# Altium PCB backplane.PCBDOC (part 3 of 4)
Units mil, origin at the board's own origin, x right, y up, seen from the top; angles counter-clockwise.
Board outline 14000 x 4750 mil, 6 copper layers (Top Layer, Internal Plane 1, Mid-Layer 1, Mid-Layer 2, Internal Plane 2, Bottom Layer), stack 54.4 mil thick; 197 components, 240 nets, 1698 pads, 1024 vias.
Unrouted connection lines stored in the file: 2.
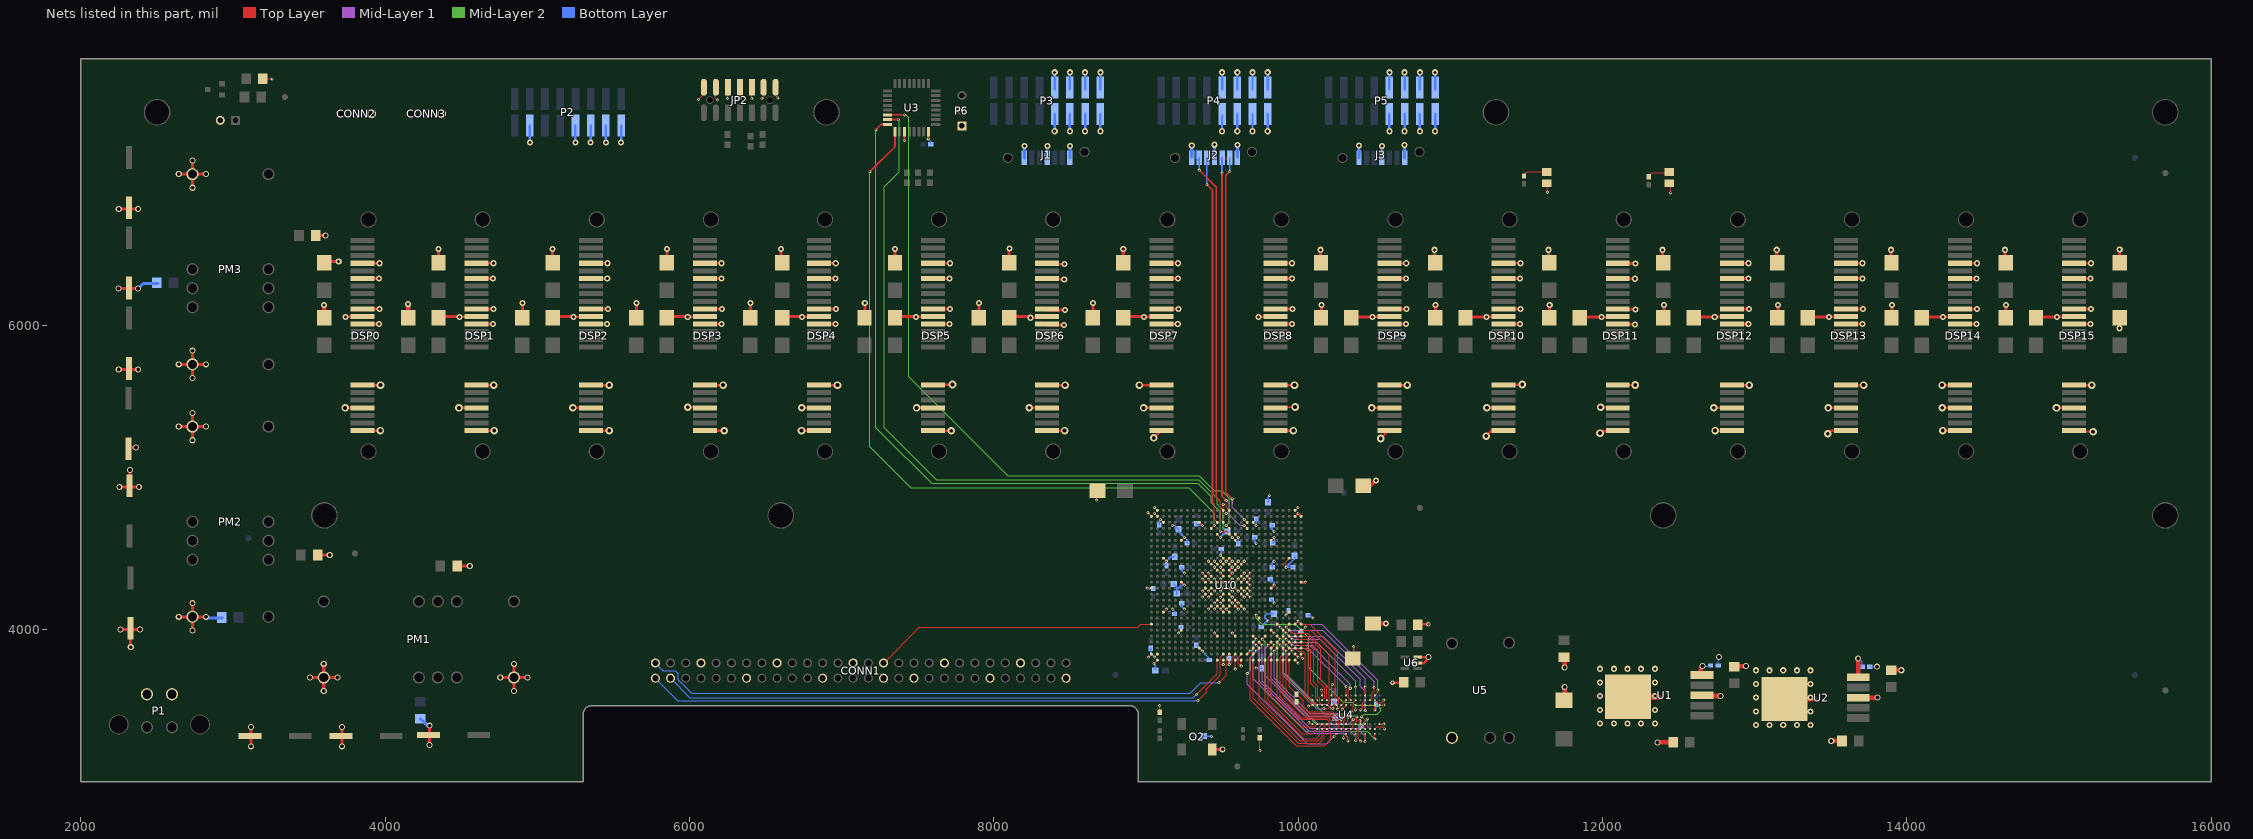
[diagram p7: the nets of this part, all layers, seen from the top]

## Via types
v1: diameter 40, hole 20, Top Layer to Bottom Layer, 338 vias
v2: diameter 20, hole 10, Top Layer to Bottom Layer, tented top, 325 vias
v3: diameter 20, hole 10, Top Layer to Bottom Layer, 197 vias
v4: diameter 40, hole 25, Top Layer to Bottom Layer, 113 vias
v5: diameter 50, hole 25, Top Layer to Bottom Layer, 48 vias
v6: diameter 30, hole 15, Top Layer to Bottom Layer, 3 vias

## Nets (pads, with @x,y where several pads share a name; then routed paths per layer and width w, separated by ;. In a path a pad name is that pad's centre, name@x,y a point inside that pad or via, vN(x,y) a via of type N, cw(c..) or ccw(c..) an arc to the next point about the centre after c; other vN are vias at no path point) (continued)
GND: C1.2 C2.2 C3.1 C4.1 C5.2 C6.2 C7.2 C8.2 C9.2 C10.2 C11.2 C12.2 C13.2 C14.2 C15.2 C16.1 C17.1 C18.2 C19.2 C20.2 C21.2 C22.2 C23.2 C24.2 C25.2 C27.2 C28.2 C29.2 C30.2 C31.2 C32.2 C34.2 C35.2 C37.2 C38.2 C39.2 C40.2 C41.2 C43.2 C44.2 C45.2 C46.1 C47.2 C48.2 C49.2 C50.2 C51.2 C52.2 C53.2 C54.2 C55.2 C56.2 C57.2 C58.2 C59.2 C60.2 C61.2 C62.2 C65.2 C67.2 C68.2 C69.2 C72.2 C73.2 C75.2 C76.2 C77.2 C78.2 C79.2 C80.2 C81.2 C82.2 C83.2 C84.2 C85.2 C86.2 C87.2 C88.2 C89.2 C90.2 C91.2 C92.2 C93.2 C104.2 C105.2 C106.2 C107.2 C108.2 C109.2 C110.2 C114.2 C115.2 C116.2 C117.2 C118.2 C119.2 C120.2 C121.1 C122.1 C123.2 C124.2 C125.1 C126.2 C127.2 C128.2 C129.2 C130.2 C131.2 C132.2 C136.2 C137.2 C138.2 C139.2 CONN1.2 CONN1.7 CONN1.12 CONN1.17 CONN1.22 CONN1.26 CONN1.29 CONN1.34 CONN1.39 CONN1.44 CONN1.49 CONN2.3 CONN3.3 DS1.2 DS2.2 DSP0.1 DSP0.4 DSP0.7 DSP0.P4 DSP0.P5 DSP0.P6 DSP0.P10 DSP0.P12 DSP1.1 DSP1.4 DSP1.7 DSP1.P4 DSP1.P5 DSP1.P6 DSP1.P10 DSP1.P12 DSP2.1 DSP2.4 DSP2.7 DSP2.P4 DSP2.P5 DSP2.P6 DSP2.P10 DSP2.P12 DSP3.1 DSP3.4 DSP3.7 DSP3.P4 DSP3.P5 DSP3.P6 DSP3.P10 DSP3.P12 DSP4.1 DSP4.4 DSP4.7 DSP4.P4 DSP4.P5 DSP4.P6 DSP4.P10 DSP4.P12 DSP5.1 DSP5.4 DSP5.7 DSP5.P4 DSP5.P5 DSP5.P6 DSP5.P10 DSP5.P12 DSP6.1 DSP6.4 DSP6.7 DSP6.P4 DSP6.P5 DSP6.P6 DSP6.P10 DSP6.P12 DSP7.1 DSP7.4 DSP7.7 DSP7.P4 DSP7.P5 DSP7.P6 DSP7.P10 DSP7.P12 DSP8.1 DSP8.4 DSP8.7 DSP8.P4 DSP8.P5 DSP8.P6 DSP8.P10 DSP8.P12 DSP9.1 DSP9.4 DSP9.7 DSP9.P4 DSP9.P5 DSP9.P6 DSP9.P10 DSP9.P12 DSP10.1 DSP10.4 DSP10.7 DSP10.P4 DSP10.P5 DSP10.P6 DSP10.P10 DSP10.P12 DSP11.1 DSP11.4 DSP11.7 DSP11.P4 DSP11.P5 DSP11.P6 DSP11.P10 DSP11.P12 DSP12.1 DSP12.4 DSP12.7 DSP12.P4 DSP12.P5 DSP12.P6 DSP12.P10 DSP12.P12 DSP13.1 DSP13.4 DSP13.7 DSP13.P4 DSP13.P5 DSP13.P6 DSP13.P10 DSP13.P12 DSP14.1 DSP14.4 DSP14.7 DSP14.P4 DSP14.P5 DSP14.P6 DSP14.P10 DSP14.P12 DSP15.1 DSP15.4 DSP15.7 DSP15.P4 DSP15.P5 DSP15.P6 DSP15.P10 DSP15.P12 J1.1 J1.4 J1.7 J2.1 J2.4 J2.7 J3.1 J3.4 J3.7 JP1.2 JP2.1 JP2.3 JP2.5 JP2.7 JP2.9 JP2.11 JP2.13 O2.2 P1.1 P1.2 P2.4 P2.10 P2.12 P2.14 P2.16 P3.9 P3.10 P3.11 P3.12 P3.13 P3.14 P3.15 P3.16 P4.9 P4.10 P4.11 P4.12 P4.13 P4.14 P4.15 P4.16 P5.9 P5.10 P5.11 P5.12 P5.13 P5.14 P5.15 P5.16 P6.1 PM1.1 PM1.7 PM2.1 PM2.7 PM3.1 PM3.7 R1.1 R2.1 R7.2 R14.1 R16.1 R18.2 R19.2 R21.1 U1.3 U2.3 U3.3 U3.8 U4.A3 U4.A7 U4.B2 U4.B3 U4.B8 U4.D2 U4.D8 U4.E7 U4.E8 U4.F2 U4.F3 U4.F8 U4.H2 U4.H8 U4.J3 U4.J7 U4.L1 U4.N1 U4.R3 U4.R7 U5.1 U6.2 U6.3 U10.A2 U10.A13 U10.A14 U10.A25 U10.AA6 U10.AA21 U10.AB12 U10.AB15 U10.AD9 U10.AD18 U10.AD24 U10.AE1 U10.AE2 U10.AE15 U10.AE16 U10.AE17 U10.AE25 U10.AE26 U10.AF2 U10.AF13 U10.AF14 U10.AF15 U10.AF16 U10.AF25 U10.B1 U10.B2 U10.B25 U10.B26 U10.C3 U10.C9 U10.C18 U10.E12 U10.E15 U10.F6 U10.F21 U10.J3 U10.J13 U10.J14 U10.J24 U10.K11 U10.K12 U10.K13 U10.K14 U10.K15 U10.K16 U10.L12 U10.L13 U10.L14 U10.L15 U10.M10 U10.M11 U10.M13 U10.M14 U10.M16 U10.M17 U10.N6 U10.N10 U10.N11 U10.N12 U10.N13 U10.N14 U10.N15 U10.N16 U10.N17 U10.N26 U10.P1 U10.P10 U10.P11 U10.P12 U10.P13 U10.P14 U10.P15 U10.P16 U10.P17 U10.P21 U10.R10 U10.R11 U10.R13 U10.R14 U10.R16 U10.R17 U10.T12 U10.T13 U10.T14 U10.T15 U10.U11 U10.U12 U10.U13 U10.U14 U10.U15 U10.U16 U10.V3 U10.V13 U10.V14 U10.V24 | length 36334.8
  Top Layer w6: R7.2@3195.12,7620 v3(3255.98,7620) ; v3(8673.23,4850.39) C38.2@8673.23,4913.39 ; v2(9007.87,4271.65) U10.P1@9035.43,4271.65 ; v2(9011.81,4767.72) U10.B1@9035.43,4744.09 ; v2(9015.75,3818.9) U10.AE1@9035.43,3838.58 ; v2(9051.18,3775.59) U10.AF2@9074.8,3799.21 ; v2(9055.12,3818.9) U10.AE2@9074.8,3838.58 ; v2(9055.12,4763.78) U10.B2@9074.8,4744.09 ; v2(9055.12,4803.15) U10.A2@9074.8,4783.46 ; R21.1@9090,3455.59 v3(9090,3499.45) ; v2(9094.49,4724.41) U10.C3@9114.17,4704.72 ; U10.V3@9114.17,4114.17 v2(9133.86,4133.86) ; v2(9212.6,3976.38) U10.AA6@9232.28,3996.06 ; U10.F6@9232.28,4586.61 v2(9251.97,4606.3) ; U10.AD9@9350.39,3877.95 v2(9370.08,3858.27) ; v2(9448.82,3976.38) U10.AB12@9468.5,3956.69 ; U10.E12@9468.5,4625.98 v2(9488.19,4606.3) ; v2(9507.87,3769.68) U10.AF13@9507.87,3799.21 ; U10.A13@9507.87,4783.46 9507.87,4803.15 v2(9507.87,4822.83) ; v2(9527.56,4133.86) U10.V14@9547.24,4114.17 ; v2(9527.56,4763.78) U10.A14@9547.24,4783.46 9527.56,4803.15 9527.56,4826.93 ; v2(9547.24,3769.69) U10.AF14@9547.24,3799.21 ; v2(9566.93,3976.38) U10.AB15@9586.61,3956.69 ; U10.U15@9586.61,4153.54 v2(9606.3,4133.86) ; U10.T15@9586.61,4192.91 v2(9606.3,4173.23) ; U10.E15@9586.61,4625.98 v2(9606.3,4606.3) ; U10.AF16@9625.98,3799.21 v3(9625.98,3759.84) 9606.3,3779.53 9606.3,3818.9 U10.AE16@9625.98,3838.58 ; U10.U16@9625.98,4153.54 v2(9645.67,4133.86) ; U10.AE17@9665.35,3838.58 U10.AD18@9704.72,3877.95 ; U10.R17@9665.35,4232.28 v2(9685.04,4212.6) ; U10.P17@9665.35,4271.65 v2(9685.04,4251.97) ; U10.N17@9665.35,4311.02 v2(9685.04,4291.34) ; U10.M17@9665.35,4350.39 v2(9685.04,4330.71) ; U10.C18@9704.72,4704.72 v2(9724.41,4685.04) ; v3(9748.01,3204.74) R16.1@9748.01,3289.36 ; U10.AA21@9822.83,3996.06 v2(9842.52,3976.38) ; U10.F21@9822.83,4586.61 v2(9842.52,4606.3) ; v2(9921.26,4094.49) U10.V24@9940.95,4114.17 ; v2(9921.26,4409.45) 9921.26,4448.82 U10.J24@9940.95,4468.5 ; U10.AD24@9940.95,3877.95 v2(9960.63,3858.27) ; U10.AF25@9980.32,3799.21 v2(10000,3779.53) v2@10003.94,3775.59 ; U10.AE25@9980.32,3838.58 v2(10000,3818.9) ; U10.B25@9980.32,4744.09 v2(10000,4763.78) ; U10.A25@9980.32,4783.46 v2(10000,4803.15) ; v2@10019.69,3811.02 U10.AE26@10019.69,3838.58 ; v3@10066.94,3503.93 U4.R3@10094.47,3503.93 ; v3@10072.83,3390.75 10085.64,3377.95 U4.R7@10094.47,3377.95 ; U4.N1@10157.46,3566.92 v3@10157.46,3598.4 ; v3@10220,3640 10220.45,3639.55 U4.L1@10220.45,3566.92 ; v3(10259.84,3476.38) 10283.46,3500 10283.46,3503.94 U4.H2@10314.94,3535.43 ; U4.J7@10283.44,3377.95 v3(10283.44,3409.43) ; v3(10299.21,3287.4) 10299.21,3330.72 U4.H8@10314.94,3346.45 ; v3(10354.33,3456.69) 10354.33,3476.38 10362.2,3484.25 10362.2,3519.7 U4.F2@10377.93,3535.43 ; U4.F8@10374.02,3346.46 10393.7,3326.77 10393.7,3282.27 v3(10409.45,3266.53) ; v3(10377.93,3472.46) U4.F3@10377.93,3503.93 ; v3@10405.51,3397.64 10409.43,3393.72 U4.E8@10409.43,3346.45 ; U4.E7@10409.43,3377.95 U4.D8@10440.92,3346.45 ; v3(10409.45,3472.44) 10425.2,3488.19 10425.2,3519.7 U4.D2@10440.92,3535.43 ; U4.B8@10503.92,3346.45 10519.67,3362.2 10551.18,3362.2 v3(10566.93,3346.46) ; v3(10503.92,3472.46) U4.B3@10503.92,3503.93 ; U4.B2@10503.92,3535.43 10519.66,3519.68 10547.24,3519.68 v3(10562.99,3535.43) ; U4.A7@10535.41,3377.95 v3(10562.99,3377.95) ; U4.A3@10535.41,3503.93 v3(10562.99,3503.93) ; v3(11637.77,6874) DS1.2@11637.77,6929.12 ; v3(12448.79,6870.06) DS2.2@12448.79,6936.99
  Top Layer w8: v3(6060,7485) 6093.78,7518.78 JP2.13@6093.78,7563.66 ; JP2.11@6170,7565 6170,7495 v3(6185,7480) ; v3(6250,7490) JP2.9@6250,7560 ; v3(6330,7490) JP2.7@6330,7560 ; v3(6410,7490) JP2.5@6410,7560 ; v3(6475,7490) 6490,7505 JP2.3@6490,7565 ; JP2.1@6565,7560 6565,7510 v3(6580,7495) ; U10.J3@9114.17,4468.5 v2(9133.86,4448.82) ; v2(9370.08,4212.6) U10.R10@9389.76,4232.28 ; v2(9370.08,4251.97) U10.P10@9389.76,4271.65 ; v2(9370.08,4330.71) U10.N10@9389.76,4311.02 ; v2(9370.08,4370.08) U10.M10@9389.76,4350.39 ; v2(9409.45,4133.86) U10.U11@9429.13,4153.54 ; v2(9409.45,4212.6) U10.R11@9429.13,4232.28 ; v2(9409.45,4251.97) U10.P11@9429.13,4271.65 ; v2(9409.45,4330.71) U10.N11@9429.13,4311.02 ; v2(9409.45,4370.08) U10.M11@9429.13,4350.39 ; v2(9409.45,4448.82) U10.K11@9429.13,4429.13 ; v2(9448.82,4133.86) U10.U12@9468.5,4153.54 ; v2(9448.82,4173.23) U10.T12@9468.5,4192.91 ; v2(9448.82,4251.97) U10.P12@9468.5,4271.65 ; v2(9448.82,4330.71) U10.N12@9468.5,4311.02 ; v2(9448.82,4409.45) U10.L12@9468.5,4389.76 ; v2(9448.82,4448.82) U10.K12@9468.5,4429.13 ; v2(9488.19,4173.23) U10.T13@9507.87,4192.91 ; v2(9488.19,4212.6) U10.R13@9507.87,4232.28 ; v2(9488.19,4251.97) U10.P13@9507.87,4271.65 ; v2(9488.19,4330.71) U10.N13@9507.87,4311.02 ; v2(9488.19,4370.08) U10.M13@9507.87,4350.39 ; v2(9488.19,4409.45) U10.L13@9507.87,4389.76 ; v2(9488.19,4448.82) U10.K13@9507.87,4429.13 ; v2(9488.19,4488.19) U10.J13@9507.87,4468.5 ; U10.V13@9507.87,4114.17 v2(9488.19,4133.86) U10.U13@9507.87,4153.54 ; v2(9527.56,4133.86) U10.U14@9547.24,4153.54 ; v2(9547.24,3769.69) 9566.93,3789.37 9566.93,3818.9 U10.AE15@9586.61,3838.58 ; U10.T14@9547.24,4192.91 v2(9566.93,4173.23) ; U10.R14@9547.24,4232.28 v2(9566.93,4212.6) ; U10.P14@9547.24,4271.65 v2(9566.93,4251.97) ; U10.N14@9547.24,4311.02 v2(9566.93,4330.71) ; U10.M14@9547.24,4350.39 v2(9566.93,4370.08) ; U10.L14@9547.24,4389.76 v2(9566.93,4409.45) ; U10.K14@9547.24,4429.13 v2(9566.93,4448.82) ; v3(9586.61,3740.16) U10.AF15@9586.61,3799.21 ; U10.P15@9586.61,4271.65 v2(9606.3,4251.97) ; U10.N15@9586.61,4311.02 v2(9606.3,4330.71) ; U10.L15@9586.61,4389.76 v2(9606.3,4409.45) ; U10.K15@9586.61,4429.13 v2(9606.3,4448.82) ; U10.R16@9625.98,4232.28 v2(9645.67,4212.6) ; U10.P16@9625.98,4271.65 v2(9645.67,4251.97) ; U10.N16@9625.98,4311.02 v2(9645.67,4330.71) ; U10.M16@9625.98,4350.39 v2(9645.67,4370.08) ; U10.K16@9625.98,4429.13 v2(9645.67,4448.82) ; U10.M17@9665.35,4350.39 v2(9685.04,4370.08)
  Top Layer w10: C27.2@8102.35,6417.31 C27.2@8102.35,6418.43 ; C1.2@10364.17,3809.06 v3(10364.17,3887.8)
  Top Layer w11: v3(7411.42,7214.57) U3.3@7411.42,7273.62 ; v3(7568.9,7224.41) U3.8@7568.9,7273.62 ; U10.C9@9350.39,4704.72 v2(9370.08,4685.04) ; v2(9527.56,4448.82) U10.J14@9547.24,4468.5 ; v2(10000,4763.78) U10.B26@10019.69,4744.09
  Top Layer w16: v5(3736.22,5456.69) DSP0.4@3854.33,5456.69 ; DSP0.7@3850.39,5606.3 v5(3968.5,5606.3) ; DSP0.1@3850.63,5307.4 v5(3968.19,5307.4) ; v5(4484.25,5456.69) DSP1.4@4598.43,5456.69 ; DSP1.1@4600.63,5307.4 v5(4716.85,5307.4) ; DSP1.7@4602.36,5606.3 v5(4712.6,5606.3) ; v5(5232.99,5457.4) DSP2.4@5350.63,5457.4 ; DSP2.7@5350.39,5606.3 v5(5472.44,5606.3) ; DSP2.1@5350.63,5307.4 v5(5472.13,5307.4) ; v5(5988.19,5460.63) DSP3.4@6098.43,5460.63 ; DSP3.1@6102.36,5307.09 v5(6228.35,5307.09) ; DSP3.7@6102.36,5606.3 v5(6220.47,5606.3) ; v5(6735.91,5307.4) DSP4.1@6850.63,5307.4 ; v5(6736.93,5457.4) DSP4.4@6850.63,5457.4 ; DSP4.7@6854.33,5606.3 v5(6972.44,5606.3) ; v5(7492.13,5456.69) DSP5.4@7602.36,5456.69 ; DSP5.1@7598.43,5307.09 v5(7720.47,5307.09) ; DSP5.7@7598.43,5610.24 v5(7728.35,5610.24) ; v5(8232.99,5457.4) DSP6.4@8350.63,5457.4 ; DSP6.7@8350.39,5606.3 v5(8468.5,5606.3) ; DSP6.1@8350.63,5307.4 v5(8464.88,5307.4) ; v5(8956.69,5606.3) DSP7.7@9102.36,5606.3 ; v5(8984.25,5456.69) DSP7.4@9102.36,5456.69 ; v5(9051.18,5259.84) DSP7.1@9098.43,5307.09 ; U10.N6@9232.28,4311.02 v2(9251.97,4291.34) ; U10.P21@9822.83,4271.65 v2(9842.52,4291.34) ; DSP8.7@9850.39,5606.3 v5(9976.38,5606.3) ; DSP8.1@9850.63,5307.4 v5(9968.82,5307.4) ; DSP8.4@9850.63,5457.4 v5(9980.32,5462.6) ; U10.N26@10019.69,4311.02 v2@10039.37,4311.02 ; v5(10484.25,5456.69) DSP9.4@10602.36,5456.69 ; v5(10543.31,5255.91) 10594.8,5307.4 DSP9.1@10600.63,5307.4 ; DSP9.7@10594.49,5606.3 v5(10716.54,5606.3) ; v6(10620.08,3651.57) C3.1@10688.98,3651.57 ; U6.3@10785.41,3818.89 v4(10856.29,3818.89) ; U6.2@10787.4,3779.53 10826.77,3779.53 v4@10856.3,3809.06 ; R18.2@10787.4,4035.43 v6(10856.3,4035.43) ; v5(11236.22,5271.65) 11271.97,5307.4 DSP10.1@11350.63,5307.4 ; v5(11240.87,5457.4) DSP10.4@11350.63,5457.4 ; DSP10.7@11346.46,5610.24 v5(11472.44,5610.24) ; v5(11984.25,5291.34) 11996.06,5303.15 DSP11.1@12098.43,5303.15 ; v5(11988.19,5460.63) DSP11.4@12102.36,5460.63 ; DSP11.7@12100.63,5607.4 v5(12215.43,5607.4) ; v5(12731.57,5457.4) DSP12.4@12850.63,5457.4 ; v5(12740.47,5307.4) DSP12.1@12850.63,5307.4 ; DSP12.7@12850.39,5606.3 v5(12964.57,5606.3) ; v5(13480.32,5287.4) 13500,5307.09 DSP13.1@13602.36,5307.09 ; v5(13484.25,5456.69) DSP13.4@13602.36,5456.69 ; DSP13.7@13602.36,5606.3 v5(13716.54,5606.3) ; v5(14232.28,5606.3) DSP14.7@14350.39,5606.3 ; v5(14232.99,5457.4) DSP14.4@14350.63,5457.4 ; v5(14236.54,5307.4) DSP14.1@14350.63,5307.4 ; v5(14984.25,5456.69) DSP15.4@15102.36,5456.69 ; DSP15.7@15098.43,5606.3 v5(15216.54,5606.3) ; DSP15.1@15102.36,5307.09 v5(15225,5300)
  Top Layer w18: v1(3738.17,6055.11) DSP0.P5@3852.34,6055.11 ; DSP0.P4@3848.4,6007.86 v1(3958.64,6007.86) ; DSP0.P6@3848.4,6106.29 v1(3962.58,6106.29) ; DSP0.P10@3850.63,6307.4 v1(3958.97,6307.4) ; DSP0.P12@3850.63,6407.4 v1(3960.67,6407.4) ; v1(4488.17,6055.11) DSP1.P5@4602.34,6055.11 ; DSP1.P4@4598.4,6007.86 v1(4708.64,6007.86) ; DSP1.P6@4598.4,6106.29 v1(4712.58,6106.29) ; DSP1.P10@4600.63,6307.4 v1(4708.97,6307.4) ; DSP1.P12@4600.63,6407.4 v1(4710.67,6407.4) ; v1(5238.17,6055.11) DSP2.P5@5352.34,6055.11 ; DSP2.P4@5348.4,6007.86 v1(5458.64,6007.86) ; DSP2.P6@5348.4,6106.29 v1(5462.58,6106.29) ; DSP2.P10@5350.63,6307.4 v1(5458.97,6307.4) ; DSP2.P12@5350.63,6407.4 v1(5460.67,6407.4) ; v1(5988.17,6055.11) DSP3.P5@6102.34,6055.11 ; DSP3.P4@6098.4,6007.86 v1(6208.64,6007.86) ; DSP3.P6@6098.4,6106.29 v1(6212.58,6106.29) ; DSP3.P10@6100.63,6307.4 v1(6208.97,6307.4) ; DSP3.P12@6100.63,6407.4 v1(6210.67,6407.4) ; v1(6738.17,6055.11) DSP4.P5@6852.34,6055.11 ; DSP4.P4@6848.4,6007.86 v1(6958.64,6007.86) ; DSP4.P6@6848.4,6106.29 v1(6962.58,6106.29) ; DSP4.P10@6850.63,6307.4 v1(6958.97,6307.4) ; DSP4.P12@6850.63,6407.4 v1(6960.67,6407.4) ; v1(7488.17,6055.11) DSP5.P5@7602.34,6055.11 ; DSP5.P4@7598.4,6007.86 v1(7708.64,6007.86) ; DSP5.P6@7598.4,6106.29 v1(7712.58,6106.29) ; DSP5.P10@7600.63,6307.4 v1(7708.97,6307.4) ; DSP5.P12@7600.63,6407.4 v1(7710.67,6407.4) ; v1(8241.85,6049.27) DSP6.P5@8356.02,6049.27 ; DSP6.P4@8352.09,6002.02 v1(8462.32,6002.02) ; DSP6.P6@8352.09,6100.45 v1(8466.26,6100.45) ; DSP6.P10@8354.31,6301.56 v1(8462.65,6301.56) ; DSP6.P12@8354.31,6401.56 v1(8464.36,6401.56) ; v1(8988.17,6055.11) DSP7.P5@9102.34,6055.11 ; DSP7.P4@9098.4,6007.86 v1(9208.64,6007.86) ; DSP7.P6@9098.4,6106.29 v1(9212.58,6106.29) ; DSP7.P10@9100.63,6307.4 v1(9208.97,6307.4) ; DSP7.P12@9100.63,6407.4 v1(9210.67,6407.4) ; v1(9738.17,6055.11) DSP8.P5@9852.34,6055.11 ; DSP8.P4@9848.4,6007.86 v1(9958.64,6007.86) ; DSP8.P6@9848.4,6106.29 v1(9962.58,6106.29) ; DSP8.P10@9850.63,6307.4 v1(9958.97,6307.4) ; DSP8.P12@9850.63,6407.4 v1(9960.67,6407.4) ; v1(10488.17,6055.11) DSP9.P5@10602.34,6055.11 ; DSP9.P4@10598.4,6007.86 v1(10708.64,6007.86) ; DSP9.P6@10598.4,6106.29 v1(10712.58,6106.29) ; DSP9.P10@10600.63,6307.4 v1(10708.97,6307.4) ; DSP9.P12@10600.63,6407.4 v1(10710.67,6407.4) ; v1(11238.17,6055.11) DSP10.P5@11352.34,6055.11 ; DSP10.P4@11348.4,6007.86 v1(11458.64,6007.86) ; DSP10.P6@11348.4,6106.29 v1(11462.58,6106.29) ; DSP10.P10@11350.63,6307.4 v1(11458.97,6307.4) ; DSP10.P12@11350.63,6407.4 v1(11460.67,6407.4) ; v1(11993.81,6053.2) DSP11.P5@12107.99,6053.2 ; DSP11.P4@12104.05,6005.96 v1(12214.28,6005.96) ; DSP11.P6@12104.05,6104.38 v1(12218.22,6104.38) ; DSP11.P10@12106.27,6305.5 v1(12214.61,6305.5) ; DSP11.P12@12106.27,6405.5 v1(12216.32,6405.5) ; v1(12738.17,6055.11) DSP12.P5@12852.34,6055.11 ; DSP12.P4@12848.4,6007.86 v1(12958.64,6007.86) ; DSP12.P6@12848.4,6106.29 v1(12962.58,6106.29) ; DSP12.P10@12850.63,6307.4 v1(12958.97,6307.4) ; DSP12.P12@12850.63,6407.4 v1(12960.67,6407.4) ; v1(13488.17,6055.11) DSP13.P5@13602.34,6055.11 ; DSP13.P4@13598.4,6007.86 v1(13708.64,6007.86) ; DSP13.P6@13598.4,6106.29 v1(13712.58,6106.29) ; DSP13.P10@13600.63,6307.4 v1(13708.97,6307.4) ; DSP13.P12@13600.63,6407.4 v1(13710.67,6407.4) ; v1(14238.17,6055.11) DSP14.P5@14352.34,6055.11 ; DSP14.P4@14348.4,6007.86 v1(14458.64,6007.86) ; DSP14.P6@14348.4,6106.29 v1(14462.58,6106.29) ; DSP14.P10@14350.63,6307.4 v1(14458.97,6307.4) ; DSP14.P12@14350.63,6407.4 v1(14460.67,6407.4) ; v1(14988.17,6055.11) DSP15.P5@15102.34,6055.11 ; DSP15.P4@15098.4,6007.86 v1(15208.64,6007.86) ; DSP15.P6@15098.4,6106.29 v1(15212.58,6106.29) ; DSP15.P10@15100.63,6307.4 v1(15208.97,6307.4) ; DSP15.P12@15100.63,6407.4 v1(15210.67,6407.4)
  Top Layer w20: v4(2246.07,6242.15) v4(2374.02,6242.15) ; v4(2248.04,5708.67) v4(2375.99,5708.67) ; v4(2248.04,6763.79) v4(2375.99,6763.79) ; v4(2251.97,4937.01) v4(2379.92,4937.01) ; v4(2259.84,4000) v4(2387.8,4000) ; C117.2@2312.99,5196.85 v4(2362.2,5196.85) ; C127.2@2322.83,4940.94 v4(2322.83,5049.21) ; v4(2326.76,3883.87) C126.2@2326.76,4007.85 ; v4(2642.7,4083.65) PM2.1@2732.28,4083.65 ; v4(2642.7,5333.65) PM2.7@2732.28,5333.65 ; v4(2642.7,5743.1) PM3.1@2732.28,5743.1 ; v4(2642.7,6993.1) PM3.7@2732.28,6993.1 ; v4(2732.28,3994.08) PM2.1@2732.28,4083.65 ; v4(2732.28,4173.23) PM2.1@2732.28,4083.65 ; v4(2732.28,5244.08) PM2.7@2732.28,5333.65 ; v4(2732.28,5423.23) PM2.7@2732.28,5333.65 ; v4(2732.28,5653.52) PM3.1@2732.28,5743.1 ; v4(2732.28,5832.67) PM3.1@2732.28,5743.1 ; v4(2732.28,6903.52) PM3.7@2732.28,6993.1 ; v4(2732.28,7082.67) PM3.7@2732.28,6993.1 ; v4(2821.85,4083.65) PM2.1@2732.28,4083.65 ; v4(2821.85,5333.65) PM2.7@2732.28,5333.65 ; v4(2821.85,5743.1) PM3.1@2732.28,5743.1 ; v4(2821.85,6993.1) PM3.7@2732.28,6993.1 ; v4(3118.08,3232.29) v4(3118.08,3360.24) ; v4(3505.89,3685.03) PM1.7@3595.46,3685.03 ; R14.1@3543.3,6590.54 v4(3608.25,6590.54) ; R1.1@3555,4490 v4@3621.93,4490 ; v4(3595.46,3595.46) PM1.7@3595.46,3685.03 ; v4(3595.46,3774.61) PM1.7@3595.46,3685.03 ; C6.2@3600,6418.43 v1(3694.02,6418.43) ; v4(3685.04,3685.03) PM1.7@3595.46,3685.03 ; v4(3716.51,3232.29) v4(3716.51,3360.24) ; v4(4291.31,3240.16) v4(4291.31,3368.11) ; C8.2@4350,6058.43 v1@4491.5,6058.43 ; C9.2@4350.39,6413.37 v1(4350.39,6499.99) ; R2.1@4472.43,4417.31 v4(4555.11,4417.31) ; v4(4755.89,3685.03) PM1.1@4845.46,3685.03 ; v4(4845.46,3595.46) PM1.1@4845.46,3685.03 ; v4(4845.46,3774.61) PM1.1@4845.46,3685.03 ; C10.2@4901.56,6055.11 v1(4901.56,6145.66) ; v4(4935.04,3685.03) PM1.1@4845.46,3685.03 ; C11.2@5100,6058.43 v1@5241.5,6058.43 ; C12.2@5100.39,6413.37 v1(5100.39,6499.99) ; C13.2@5651.56,6055.11 v1(5651.56,6145.66) ; C14.2@5850,6058.43 v1@5991.5,6058.43 ; C15.2@5850.39,6413.37 v1(5850.39,6499.99) ; C18.2@6401.56,6055.11 v1(6401.56,6145.66) ; C19.2@6600,6058.43 v1@6741.5,6058.43 ; C20.2@6600.39,6413.37 v1(6600.39,6499.99) ; C21.2@7151.56,6055.11 v1(7151.56,6145.66) ; C22.2@7350,6058.43 v1@7491.5,6058.43 ; C23.2@7350.39,6413.37 v1(7350.39,6499.99) ; C24.2@7901.56,6055.11 v1(7901.56,6145.66) ; C25.2@8100,6058.43 v1@8241.5,6058.43 ; C27.2@8100,6418.43 v1@8100,6506.27 ; C30.2@8651.57,6055.11 v1(8651.57,6145.66) ; C31.2@8850,6058.43 v1@8991.5,6058.43 ; C32.2@8850.39,6413.37 v1(8850.39,6499.99) ; O2.2@9436.2,3212.59 v4(9503.94,3212.59) ; C35.2@10145.65,6417.31 v1(10145.65,6496.05) ; C34.2@10153.52,6059.04 v1(10153.52,6133.85) ; C37.2@10346.44,6055.11 v1(10488.17,6055.11) ; C40.2@10895.65,6417.31 v1(10895.65,6496.05) ; C39.2@10903.52,6059.04 v1(10903.52,6133.85) ; C41.2@11096.44,6055.11 v1(11238.17,6055.11) ; C44.2@11645.65,6417.31 v1(11645.65,6496.05) ; C43.2@11653.52,6059.04 v1(11653.52,6133.85) ; C45.2@11846.44,6055.11 v1@11988.17,6055.11 ; C48.2@12395.65,6417.31 v1(12395.65,6496.05) ; C47.2@12403.52,6059.04 v1(12403.52,6133.85) ; C49.2@12596.44,6055.11 v1(12738.17,6055.11) ; C51.2@13145.65,6417.31 v1(13145.65,6496.05) ; C50.2@13153.52,6059.04 v1(13153.52,6133.85) ; C52.2@13346.44,6055.11 v1(13488.17,6055.11) ; C54.2@13895.65,6417.31 v1(13895.65,6496.05) ; C53.2@13903.52,6059.04 v1(13903.52,6133.85) ; C55.2@14096.44,6055.11 v1(14238.17,6055.11) ; C57.2@14645.65,6417.31 v1(14645.65,6496.05) ; C56.2@14653.52,6059.04 v1(14653.52,6133.85) ; C58.2@14846.44,6055.11 v1(14988.17,6055.11) ; v1(15397.61,5980.3) C59.2@15397.61,6055.11 ; C60.2@15400,6418.43 v1(15400,6498.44)
  Top Layer w24: C29.2@10433.07,4940.94 10472.44,4940.94 v1(10511.81,4980.31) ; C28.2@10500,4039.37 v1(10576.77,4039.37)
  Top Layer w30: C5.2@3598.43,6059.06 v1(3598.43,6133.86) ; C7.2@4150,6058.43 v1(4150,6138.19) ; C2.2@11751.97,3533.46 v4(11751.97,3622.05) ; v4(11751.97,3750) R19.2@11751.97,3818.9 ; U1.3@12165.35,3562.99 v1@12352.36,3562.99 ; U1.3@12173.2,3553.14 12372.04,3553.14 ; v4(12362.2,3257.87) C4.1@12460.63,3257.87 ; U1.3@12657.48,3562.99 v4(12775.59,3562.99) ; C16.1@12864.17,3759.84 v4(12942.91,3759.84) ; U2.3@13196.82,3543.3 13395.66,3543.3 ; v4(13503.94,3267.71) C17.1@13574.78,3267.71 ; U2.3@13681.82,3552.3 v4(13808.21,3552.3) ; C46.1@13897.61,3732.28 v4(13964.57,3732.28)
  Mid-Layer 1 w16: v5(7720.47,5307.09) v5@7728.35,5314.96
  Mid-Layer 1 w20: v4(3608.25,6590.54) v4@3612.2,6594.49
  Bottom Layer w6: v3(7568.9,7224.41) 7585.59,7207.72 C65.2@7585.59,7190 ; v2(9370.08,3858.27) 9415.59,3812.76 C80.2@9415.59,3800
  Bottom Layer w8: C92.2@9133.86,4419.29 v2(9133.86,4448.82) ; v2(9173.23,4133.86) 9191.01,4116.08 C89.2@9191.01,4094.49 ; C139.2@10236.22,3533.46 10259.84,3509.84 v3(10259.84,3476.38) ; v3@10407.48,3401.57 10415.33,3393.72 C138.2@10415.33,3362.2 ; v3(10503.92,3472.46) 10511.79,3480.34 C136.2@10511.79,3509.84 ; C61.2@12761.72,3763.77 v4(12765.75,3818.9) ; C62.2@13757.85,3755.9 v4(13805.11,3755.9)
  Bottom Layer w10: v2@9009.84,4269.69 C93.2@9047.24,4269.69 ; C83.2@9031.5,3876.05 9031.5,3842.52 v2(9055.12,3818.9) ; v2(9051.18,3775.59) 9061.02,3765.75 C109.2@9061.02,3732.28 ; C91.2@9086.61,4687.01 9086.61,4716.54 v2(9094.49,4724.41) ; v2(9133.86,4448.82) 9163.39,4478.35 C114.2@9188.98,4478.35 ; v2(9173.23,4685.04) 9187.01,4685.04 C115.2@9212.6,4659.45 9212.6,4645.67 v2(9251.97,4606.3) 9269.75,4588.52 C69.2@9269.75,4566.93 ; C104.2@9183.07,4299.21 9202.76,4279.53 C107.2@9202.76,4232.28 ; 9202.76,4261.81 9232.28,4291.34 v2(9251.97,4291.34) ; v2(9212.6,3976.38) 9232.28,3996.06 C77.2@9232.28,4015.75 ; C88.2@9234.25,4173.23 9234.25,4151.57 v2(9251.97,4133.86) ; C76.2@9234.25,4409.45 9234.25,4387.8 v2(9251.97,4370.08) ; C75.2@9330.69,3895.66 9332.68,3895.66 v2(9370.08,3858.27) ; C87.2@9330.71,4694.94 9340.61,4685.04 v2(9370.08,4685.04) ; C108.2@9379.92,3297.24 v3(9429.13,3297.24) ; v2(9488.19,4488.19) 9494.03,4494.03 C78.2@9494.03,4519.69 ; v2(9488.19,4606.3) 9527.56,4645.67 C110.2@9533.46,4645.67 ; v2@9545.34,3771.59 C82.2@9545.34,3811.02 ; C73.2@9606.3,4564.9 v2(9606.3,4606.3) ; C81.2@9714.5,4606.3 9714.5,4576.83 v2(9724.41,4566.93) ; v2(9724.41,4685.04) C72.2@9724.41,4726.44 ; v3@9728.35,3746.06 C131.2@9763.76,3746.06 ; C128.2@9757.85,4015.74 9757.85,4019.67 9793.31,4055.12 v2(9803.15,4055.12) 9781.5,4076.77 9781.5,4094.49 ; 9783.46,4094.49 9793.3,4104.32 C129.2@9842.5,4104.32 ; C105.2@9803.15,4836.61 9803.15,4872.05 v3(9812.99,4881.89) ; C85.2@9816.87,4330.71 9842.52,4305.06 v2(9842.52,4291.34) ; C90.2@9824.74,4196.85 9842.52,4179.07 v2(9842.52,4173.23) ; C86.2@9828.74,4409.45 9828.74,4435.04 v2(9842.52,4448.82) ; C67.2@9828.74,4685.04 9828.74,4659.45 v2(9842.52,4645.67) ; C84.2@9832.61,4566.93 9842.52,4576.83 v2(9842.52,4606.3) ; v2(9921.26,4094.49) 9937.01,4118.11 C79.2@9937.01,4124.02 ; C68.2@9966.54,4409.45 v2(9921.26,4409.45) 9976.38,4464.57 C106.2@9976.38,4486.22 ; C130.2@10017.7,3984.24 v3(10049.2,4015.75) ; C132.2@10064.94,4094.48 10078.75,4094.48 v3(10098.43,4074.8) ; C137.2@10244.07,3419.28 10253.93,3409.43 v3(10283.44,3409.43)
  Bottom Layer w11: v1@9500,7280 9500,7375 P4.10@9505,7380
  Bottom Layer w16: v1(4950,7200) P2.4@4950,7312.6 ; v1(5250,7200) P2.10@5250,7312.6 ; v1(5350,7200) P2.12@5350,7312.6 ; v1(5450,7200) P2.14@5450,7312.6 ; v1(5550,7200) P2.16@5550,7312.6 ; v1(8400,7275) P3.10@8400,7387.6 ; P3.9@8400,7550 v1(8400,7662.6) ; v1(8500,7275) P3.12@8500,7387.6 ; P3.11@8500,7550 v1(8500,7662.6) ; v1(8600,7275) P3.14@8600,7387.6 ; P3.13@8600,7550 v1(8600,7662.6) ; v1(8700,7275) P3.16@8700,7387.6 ; P3.15@8700,7550 v1(8700,7662.6) ; P4.9@9500,7550 v1(9500,7662.6) ; v1(9600,7275) P4.12@9600,7387.6 ; P4.11@9600,7550 v1(9600,7662.6) ; v1(9700,7275) P4.14@9700,7387.6 ; P4.13@9700,7550 v1(9700,7662.6) ; v1(9800,7275) P4.16@9800,7387.6 ; P4.15@9800,7550 v1(9800,7662.6) ; v1(10600,7275) P5.10@10600,7387.6 ; P5.9@10600,7550 v1(10600,7662.6) ; v1(10700,7275) P5.12@10700,7387.6 ; P5.11@10700,7550 v1(10700,7662.6) ; v1(10800,7275) P5.14@10800,7387.6 ; P5.13@10800,7550 v1(10800,7662.6) ; v1(10900,7275) P5.16@10900,7387.6 ; P5.15@10900,7550 v1(10900,7662.6)
  Bottom Layer w20: v4@2380,6245 2410,6275 C125.1@2505,6275 ; v4@2821.85,4083.15 2830,4075 C122.1@2930,4075 ; C121.1@4230,3414.88 4274.88,3370 v4@4285,3370 ; J1.7@8202.2,7095.67 v1(8202.2,7178.35) ; J1.4@8350,7100 v1@8350,7178.74 ; J1.1@8501.42,7099.61 v1(8501.42,7178.35) ; J2.7@9300.79,7104.33 v1(9300.79,7182.28) ; J2.4@9450,7100 v1(9450,7186.61) ; J2.1@9600.79,7104.33 v1(9600.79,7183.86) ; J3.7@10400,7100 v1(10400,7182.44) ; J3.4@10550,7100 v1(10550,7178.9) ; J3.1@10700,7100 v1(10700,7185.28)
  other v1: 13008.35,3372.17 13098.35,3372.17 13188.35,3372.17 13278.35,3372.17 13368.35,3372.17 11984.72,3382.01 12074.72,3382.01 12164.72,3382.01 12254.72,3382.01 12344.72,3382.01 13008.35,3462.17 13368.35,3462.17 11984.72,3472.01 12344.72,3472.01 13008.35,3552.17 13368.35,3552.17 11984.72,3562.01 12344.72,3562.01 13008.35,3642.17 13368.35,3642.17 11984.72,3652.01 12344.72,3652.01 13008.35,3732.17 13098.35,3732.17 13188.35,3732.17 13278.35,3732.17 13368.35,3732.17 11984.72,3742.01 12074.72,3742.01 12164.72,3742.01 12254.72,3742.01 12344.72,3742.01 8102.35,6503.92 8351.81,7178.35 9500,7275
  other v2: 10027.56,3811.02 9685.04,3858.27 10049.21,4311.02
  other v3: 10069.88,3388.78 10405.51,3401.57 10066.93,3496.06 10153.54,3602.36 10225,3640 9724.35,3746.05
  other v4: 3635,4490
IOCLK: CONN1.25 U10.Y1 | length 1866.2
  Top Layer w6: CONN1.25@7275,3780 7510.75,4015.75 8946.85,4015.75 8966.54,4035.43 U10.Y1@9035.43,4035.43
LDQS: U4.F7 U10.Y22 | length 990.7
  Top Layer w6: U10.Y22@9862.2,4035.43 v2(9881.89,4015.75) ; U4.F7@10377.93,3377.95 10377.93,3389.74 10385.83,3397.64 v3(10385.83,3425.2)
  Mid-Layer 2 w6: v2(9881.89,4015.75) 9901.57,3996.06 9901.57,3716.54 10173.23,3444.88 10334.65,3444.88 10346.46,3433.07 10377.95,3433.07 v3(10385.83,3425.2)
MEMA0: U4.M8 U10.AE18 | length 1059.1
  Top Layer w6: U10.AE18@9704.72,3838.58 9685.04,3818.9 9685.04,3539.37 9988.19,3236.22 10173.23,3236.22 10214.54,3277.53 10214.54,3320.89 10208.66,3326.77 U4.M8@10188.96,3346.45
MEMA1: U4.M3 U10.AA24 | length 667.9
  Top Layer w6: U10.AA24@9940.95,3996.06 9960.63,3976.38 10062.99,3976.38 10204.72,3834.65 10204.72,3519.7 U4.M3@10188.96,3503.93
MEMA2: U4.M7 U10.AF18 | length 954.5
  Top Layer w6: U10.AF18@9704.72,3799.21 9704.72,3547.24 10000,3251.97 10137.8,3251.97 10173.23,3287.4 10173.23,3362.2 U4.M7@10188.96,3377.95
MEMA3: U4.N2 U10.AB25 | length 540.3
  Top Layer w6: U10.AB25@9980.32,3956.69 10000,3937.01 10055.12,3937.01 10129.92,3862.2 10129.92,3661.42 10173.63,3617.71 10173.63,3551.59 U4.N2@10157.46,3535.43
MEMA4: U4.N8 U10.AF19 | length 850.6
  Top Layer w6: U10.AF19@9744.09,3799.21 9744.09,3535.43 10011.81,3267.72 10129.92,3267.72 10157.46,3295.26 U4.N8@10157.46,3346.45
MEMA5: U4.N3 U10.AC26 | length 488.9
  Top Layer w6: U10.AC26@10019.69,3917.32 10051.18,3917.32 10102.36,3866.14 10102.36,3653.54 10129.92,3625.98 10129.92,3559.06 10141.73,3547.24 10141.73,3519.66 U4.N3@10157.46,3503.93
MEMA6: U4.N7 U10.AF20 | length 813.6
  Top Layer w6: U10.AF20@9783.46,3799.21 9783.46,3535.43 10035.43,3283.46 10118.11,3283.46 10141.73,3307.09 10141.73,3362.2 U4.N7@10157.46,3377.95
MEMA7: U4.P2 U10.AC25 | length 469.9
  Top Layer w6: U10.AC25@9980.32,3917.32 10000,3897.64 10047.24,3897.64 10082.68,3862.2 10082.68,3645.67 10114.17,3614.17 10114.17,3547.22 U4.P2@10125.96,3535.43
MEMA8: U4.P8 U10.AE21 | length 736.2
  Top Layer w6: U10.AE21@9822.83,3838.58 9803.15,3818.9 9803.15,3539.37 10027.56,3314.96 10094.49,3314.96 U4.P8@10125.96,3346.45
MEMA9: U4.P3 U10.AD25 | length 471.2
  Top Layer w6: U10.AD25@9980.32,3877.95 10000,3858.27 10031.5,3858.27 10047.43,3842.33 10047.43,3550.99 10078.74,3519.68 10110.21,3519.68 U4.P3@10125.96,3503.93
MEMA10: U4.M2 U10.AB26 | length 516.7
  Top Layer w6: U10.AB26@10019.69,3956.69 10062.99,3956.69 10149.61,3870.08 10149.61,3665.35 10188.96,3626 U4.M2@10188.96,3535.43
MEMA11: U4.P7 U10.AF21 | length 631.4
  Top Layer w6: U10.AF21@9822.83,3799.21 9822.83,3559.05 10019.68,3362.2 10110.24,3362.2 U4.P7@10125.96,3377.95
MEMA12: U4.R2 U10.AD26 | length 387.3
  Top Layer w6: U10.AD26@10019.69,3877.95 10043.31,3877.95 10066.93,3854.33 10066.93,3562.96 U4.R2@10094.47,3535.43
MEMBA0: U4.L2 U10.AD23 | length 646.3
  Top Layer w6: U10.AD23@9901.58,3877.95 v2(9921.26,3858.27) ; U4.L2@10220.45,3535.43 10220.45,3531.52 10236.22,3515.75 10236.22,3488.19 v3(10228.35,3480.32)
  Mid-Layer 1 w6: v2(9921.26,3858.27) 9921.26,3704.72 10118.11,3507.87 10188.98,3507.87 10216.54,3480.32 v3(10228.35,3480.32)
MEMBA1: U4.L3 U10.AC22 | length 652.8
  Top Layer w6: U10.AC22@9862.2,3917.32 v2(9881.89,3897.64) ; v3(10169.29,3480.32) 10196.84,3480.32 U4.L3@10220.45,3503.93
  Mid-Layer 1 w6: v2(9881.89,3897.64) 9901.57,3877.95 9901.57,3700.79 10122.05,3480.32 v3(10169.29,3480.32)
MEMC\A\S\: U4.L7 U10.AE23 | length 707.2
  Top Layer w6: U10.AE23@9897.64,3834.65 9881.89,3818.9 9881.89,3559.06 10019.69,3421.26 10196.85,3421.26 10220.45,3397.66 U4.L7@10220.45,3377.95
MEMC\S\: U4.L8 U10.AF22 | length 709.5
  Top Layer w6: U10.AF22@9862.2,3799.21 9862.2,3551.18 10004.13,3409.26 10189.17,3409.26 10204.72,3393.7 10204.72,3362.18 U4.L8@10220.45,3346.45
MEMCKE: U4.K2 U10.AA26 | length 593.7
  Top Layer w6: U10.AA26@10019.69,3996.06 10082.68,3996.06 10110.24,3968.5 10244.09,3834.65 10244.09,3551.18 10251.95,3543.33 U4.K2@10251.95,3535.43
MEMCKN: R22.2 U4.K8 U10.AE24 | length 744.9
  Top Layer w6: U10.AE24@9940.95,3838.58 9921.26,3818.9 9921.26,3582.68 10058.68,3445.26 10220.09,3445.26 10267.72,3397.64 10267.72,3362.2 U4.K8@10251.95,3346.44
MEMCKP: R22.1 U4.J8 U10.AF24 | length 729.5
  Top Layer w6: U10.AF24@9940.95,3799.21 9940.95,3690.94 9940.94,3624.65 10032.07,3533.52 10032.07,3495.49 10066.93,3460.63 10228.35,3460.63 10254.43,3434.55 10289.86,3434.55 10307.09,3417.32 10307.09,3405.51 10299.21,3397.64 10299.21,3362.2 U4.J8@10283.45,3346.44
MEMDQ0: U4.G8 U10.AC21 | length 1033.4
  Top Layer w6: v2@9803.15,3897.64 U10.AC21@9822.83,3917.32 ; U4.G8@10346.46,3346.46 10362.2,3362.2 v3(10362.2,3409.45)
  Mid-Layer 1 w6: v2(9803.15,3897.64) 9783.46,3877.95 9783.46,3696.85 10064.33,3415.99 10092.78,3415.99 10126.68,3382.08 10334.83,3382.08 v3(10362.2,3409.45) v3@10355.55,3409.45
MEMDQ1: U4.G2 U10.AC24 | length 637.4
  Top Layer w6: U10.AC24@9940.95,3917.32 v2(9960.63,3897.64) ; v3(10342.52,3614.17) 10330.71,3602.36 10330.71,3551.18 U4.G2@10346.46,3535.43
  Mid-Layer 1 w6: v2@9956.69,3897.64 10086.61,3897.64 10342.52,3641.73 v3(10342.52,3614.17)
MEMDQ2: U4.H7 U10.AD21 | length 914.6
  Top Layer w6: U10.AD21@9822.83,3877.95 v2(9842.52,3897.64) ; U4.H7@10314.94,3377.95 10314.94,3385.81 10326.77,3397.64 v3(10326.77,3421.26)
  Mid-Layer 1 w6: v2(9842.52,3897.64) 9822.83,3877.95 9822.83,3677.17 10070.87,3429.13 10318.9,3429.13 v3(10326.77,3421.26)
MEMDQ3: U4.H3 U10.AD22 | length 798.8
  Top Layer w6: v2(9842.52,3858.27) U10.AD22@9862.2,3877.95 ; v3(10291.34,3476.38) 10314.94,3499.98 U4.H3@10314.94,3503.93
  Mid-Layer 1 w6: v2(9842.52,3858.27) 9842.52,3681.1 10074.8,3448.82 10263.78,3448.82 v3(10291.34,3476.38)
MEMDQ4: U4.H1 U10.AC23 | length 593.1
  Top Layer w6: U10.AC23@9901.58,3917.32 v2(9921.26,3897.64) ; U4.H1@10314.94,3566.92 v3(10314.94,3625.96)
  Mid-Layer 1 w6: v2(9921.26,3897.64) 9940.94,3877.95 10062.95,3877.95 v3(10314.94,3625.96)
MEMDQ5: U4.H9 U10.AD19 | length 1075.3
  Top Layer w6: v2(9724.41,3858.27) U10.AD19@9744.09,3877.95 ; U4.H9@10314.94,3314.95 10314.94,3298.06 10326.77,3286.23 v3(10326.77,3267.72)
  Mid-Layer 1 w6: v2(9724.41,3858.27) 9704.72,3838.58 9704.72,3676.18 10062.01,3318.9 10299.21,3318.9 10326.77,3291.34 v3(10326.77,3267.72)
MEMDQ6: U4.F1 U10.AB23 | length 693.2
  Top Layer w6: U10.AB23@9901.58,3956.69 v2(9921.26,3937.01) ; U4.F1@10377.93,3566.92 v3(10377.93,3622.03)
  Mid-Layer 1 w6: v2(9921.26,3937.01) 9940.94,3917.32 10122.05,3917.32 10377.93,3661.44 v3(10377.93,3622.03)
MEMDQ7: U4.F9 U10.AC18 | length 1125.2
  Top Layer w6: U10.AC18@9704.72,3917.32 v2(9724.41,3897.64) ; v3(10377.93,3271.67) U4.F9@10377.93,3314.95
  Mid-Layer 1 w6: v2(9724.41,3897.64) 9744.09,3877.95 9744.09,3660.43 10073.63,3330.9 10342.33,3330.9 10377.93,3295.3 v3(10377.93,3271.67)
MEMDQ8: U4.C8 U10.AB22 | length 1127.6
  Top Layer w6: U10.AB22@9862.2,3956.69 v2(9881.89,3937.01) ; v3(10456.69,3413.39) 10456.69,3362.18 U4.C8@10472.42,3346.45
  Mid-Layer 2 w6: v2(9881.89,3937.01) 9862.2,3917.32 9862.2,3633.86 10114.17,3381.89 10216.54,3381.89 10220.28,3378.14 10421.45,3378.14 v3(10456.69,3413.39)
MEMDQ9: U4.C2 U10.Y24 | length 888.5
  Top Layer w6: v2(9921.26,4015.75) U10.Y24@9940.95,4035.43 ; U4.C2@10472.42,3535.43 10488.19,3551.19 10488.19,3582.68 10500,3594.49 v3(10500,3618.11)
  Mid-Layer 1 w6: v2(9921.26,4015.75) 9940.94,3996.06 10161.42,3996.06 10500,3657.48 v3(10500,3618.11)
MEMDQ10: U4.D7 U10.W19 | length 1442.1
  Top Layer w6: v2(9724.41,4094.49) U10.W19@9744.09,4074.8 ; v3(10417.32,3426.39) 10440.92,3402.79 U4.D7@10440.92,3377.95
  Mid-Layer 2 w6: v2(9724.41,4094.49) 9724.41,4074.8 9763.78,4035.43 9980.31,4035.43 10068.9,3946.85 10068.9,3750 10295.28,3523.62 10353.98,3523.62 10373.67,3503.94 10521.65,3503.94 10541.34,3484.25 10541.34,3464.57 10519.47,3442.7 10433.64,3442.7 v3(10417.32,3426.39)
MEMDQ11: U4.D3 U10.AB24 | length 848.6
  Top Layer w6: U10.AB24@9937.01,3960.63 v2(9960.63,3937.01) ; v3(10440.94,3468.5) U4.D3@10440.94,3507.87
  Mid-Layer 1 w6: v2(9960.63,3937.01) 10145.67,3937.01 10409.45,3673.23 10409.45,3625.98 10440.94,3594.49 v3(10440.94,3468.5)
MEMDQ12: U4.D1 U10.AA23 | length 787.3
  Top Layer w6: U10.AA23@9897.64,4000 v2(9921.26,3976.38) ; U4.D1@10440.92,3566.92 v3(10440.92,3622.03)
  Mid-Layer 1 w6: v2(9921.26,3976.38) 9940.94,3956.69 10161.42,3956.69 10440.92,3677.19 v3(10440.92,3622.03)
MEMDQ13: U4.D9 U10.AC19 | length 1177.8
  Top Layer w6: U10.AC19@9744.09,3917.32 v2(9763.78,3897.64) ; v3(10440.92,3263.8) U4.D9@10440.92,3314.95
  Mid-Layer 1 w6: v2(9763.78,3897.64) 9763.78,3661.42 10074.8,3350.39 10389.76,3350.39 10440.92,3299.23 v3(10440.92,3263.8)
MEMDQ14: U4.B1 U10.Y25 | length 819.5
  Top Layer w6: U10.Y25@9980.32,4035.43 v2(10000,4055.12) ; U4.B1@10503.92,3566.92 10523.62,3586.63 v3(10523.62,3602.36)
  Mid-Layer 1 w6: v2(10000,4055.12) 10019.68,4035.43 10153.54,4035.43 10523.62,3665.35 v3(10523.62,3602.36)
MEMDQ15: U4.B9 U10.AB20 | length 1264.8
  Top Layer w6: v2(9763.78,3937.01) U10.AB20@9783.46,3956.69 ; v3(10503.92,3279.55) U4.B9@10503.92,3314.95
  Mid-Layer 2 w6: v2(9763.78,3937.01) 9783.46,3917.32 9783.46,3594.49 10047.24,3330.71 10452.76,3330.71 v3(10503.92,3279.55)
MEMODT: U4.K9 U10.AB18 | length 1126.1
  Top Layer w6: U10.AB18@9704.72,3956.69 v2(9724.41,3937.01) ; v3(10236.22,3297.24) 10236.22,3299.23 U4.K9@10251.95,3314.95
  Mid-Layer 1 w6: v3(9665.35,3710.63) 9665.35,3641.73 10059.06,3248.03 10187.01,3248.03 v3(10236.22,3297.24)
  Bottom Layer w6: v3(9665.35,3710.63) 9685.04,3730.32 9685.04,3818.9 9704.72,3838.58 9704.72,3917.32 v2(9724.41,3937.01)
MEMR\A\S\: U4.K7 U10.AF23 | length 669.5
  Top Layer w6: U10.AF23@9901.58,3799.21 9901.58,3568.15 10036.47,3433.26 10212.41,3433.26 10251.95,3393.72 U4.K7@10251.95,3377.95
MEMW\E\: U4.K3 U10.Y26 | length 680.9
  Top Layer w6: U10.Y26@10019.69,4035.43 10055.12,4035.43 ; 10047.24,4035.43 10074.8,4035.43 10259.84,3850.39 10259.84,3559.06 10267.72,3551.18 10267.72,3519.7 U4.K3@10251.95,3503.93
MMCIO1: U3.1 U10.D11 | length 4690.4
  Top Layer w6: U10.D11@9429.13,4665.35 v2(9448.82,4685.04)
  Top Layer w11: v3(7185.04,7007.87) 7349.76,7172.6 U3.1@7349.76,7271.54
  Mid-Layer 2 w6: v3(7185.04,7007.87) 7185.04,5200.79 7452.76,4933.07 9279.53,4933.07 9448.82,4763.78 v2(9448.82,4685.04)
MMCIO2: U3.32 U10.E14 | length 4758.5
  Top Layer w6: v2(9488.19,4645.67) 9527.56,4645.67 U10.E14@9547.24,4625.98
  Top Layer w11: v3(7224.41,7283.46) 7260.71,7319.76 U3.32@7300.08,7319.76
  Mid-Layer 2 w6: v3(7224.41,7283.46) 7224.41,5326.77 7261.13,5290.05 7590.55,4960.63 9340.55,4960.63 9429.13,4872.05 9429.13,4832.68 9488.19,4773.62 v2(9488.19,4645.67)
MMCIO3: U3.31 U10.F15 | length 4843.6
  Top Layer w6: v2(9566.93,4606.3) U10.F15@9586.61,4586.61
  Top Layer w11: U3.31@7303.15,7352.36 v3(7372.05,7352.36)
  Mid-Layer 2 w6: v3(7372.05,7352.36) 7377.95,7346.46 7377.95,7007.87 7279.53,6909.45 7279.53,5326.77 7622.05,4984.25 9346.46,4984.25 9468.5,4862.2 9468.5,4822.83 9506.99,4784.35 9506.99,4666.24 v2(9566.93,4606.3)
MMCIO4: U3.30 U10.D14 | length 4499.2
  Top Layer w6: v2(9527.56,4685.04) U10.D14@9547.24,4665.35
  Top Layer w11: U3.30@7301.54,7382.76 v3(7412.52,7382.76)
  Mid-Layer 2 w6: v3(7412.52,7382.76) 7420.39,7382.76 7440.94,7362.2 7440.94,5661.42 8090.55,5011.81 9348.43,5011.81 9448.82,4911.42 9498.03,4911.42 9547.24,4862.2 9547.24,4704.72 v2(9527.56,4685.04)
NEPRX+: J2.6 U10.C13 | length 2533.5
  Top Layer w6: 9488.19,4842.52 9488.19,4724.41 U10.C13@9507.87,4704.72
  Top Layer w11: v3(9350,7020) 9462.5,6907.5 9462.5,4868.21 9488.19,4842.52
  Bottom Layer w11: 9329.92,7150 9329.92,7097.24 J2.6@9340.55,7086.61 ; v3(9350,7020) J2.6@9350,7105
NEPRX-: J2.5 U10.C12 | length 2423.7
  Top Layer w6: 9448.82,4822.83 9448.82,4724.41 U10.C12@9468.5,4704.72
  Top Layer w11: v3(9400,6925) 9437.5,6887.5 9437.5,4834.15 9448.82,4822.83
  Bottom Layer w11: v3(9400,6925) J2.5@9400,7100
NEPTX+: J2.2 U10.C17 | length 2482.6
  Top Layer w6: 9527.56,7087.5 9527.56,7106.3 ; v2(9645.67,4724.41) U10.C17@9665.35,4704.72
  Top Layer w11: v3(9550,7010) 9525,6985 9525,4900 v3(9566.93,4858.07)
  Mid-Layer 1 w6: 9566.93,4822.83 9566.93,4803.15 v2(9645.67,4724.41)
  Mid-Layer 1 w11: 9566.93,4822.83 v3(9566.93,4858.07)
  Bottom Layer w11: v3(9550,7010) J2.2@9550,7100
NEPTX-: J2.3 U10.D17 | length 2520.4
  Top Layer w6: v2(9645.67,4685.04) U10.D17@9665.35,4665.35
  Top Layer w11: v3(9500,7000) 9500,4875 v3(9527.56,4847.44)
  Mid-Layer 1 w6: v3(9527.56,4847.44) 9547.24,4827.76 9547.24,4753.94 9616.14,4685.04 v2(9645.67,4685.04)
  Bottom Layer w11: v3(9500,7000) J2.3@9500,7100
NetC61_1: C61.1 U1.5 | length 112.3
  Top Layer w30: U1.5@12647.64,3700.79 12647.64,3750 v4(12657.48,3759.84)
  Bottom Layer w8: v4(12657.48,3759.84) C61.1@12706.69,3759.84
NetC62_1: C62.1 U2.5 | length 181.9
  Top Layer w30: U2.5@13681.1,3690.94 v4(13681.1,3809.06)
  Bottom Layer w8: v4(13681.1,3809.06) 13706.67,3783.49 C62.1@13706.67,3755.9
NetCONN1_54: CONN1.54 U10.AF12 | length 3799.9
  Top Layer w6: v3(9330.71,3572.83) 9468.5,3710.63 U10.AF12@9468.5,3799.21
  Bottom Layer w8: CONN1.54@5875,3680 6001.85,3553.15 9311.02,3553.15 v3(9330.71,3572.83)
NetCONN1_55: CONN1.55 U10.AE14 | length 4052.2
  Top Layer w6: v3(9478.35,3651.57) 9527.56,3700.79 9527.56,3818.9 U10.AE14@9547.24,3838.58
  Bottom Layer w8: CONN1.55@5775,3780 5824.69,3730.32 5905.51,3730.32 5925.2,3710.63 5925.2,3671.26 6013.78,3582.68 9291.34,3582.68 9360.24,3651.57 v3(9478.35,3651.57)
NetCONN1_56: CONN1.56 U10.AE13 | length 4000.7
  Top Layer w6: v3(9340.55,3533.46) 9399.61,3592.52 9399.61,3612.2 9488.19,3700.79 9488.19,3818.9 U10.AE13@9507.87,3838.58
  Bottom Layer w8: CONN1.56@5775,3680 5921.54,3533.46 v3(9340.55,3533.46)
NetDS1_1: DS1.1 R12.2 | length 159.3
  Top Layer w6: R12.2@11485,6985 11507.4,7007.4 DS1.1@11635,7007.4
NetDS2_1: DS2.1 R13.2 | length 149.8
  Top Layer w6: R13.2@12305,6980 12328.92,7003.92 DS2.1@12444.86,7003.92